# Altium PCB ControlPCB.PcbDoc
Units mm, origin at the board's own origin, x right, y up, seen from the top; angles counter-clockwise.
Board outline 50 x 108 mm, 4 copper layers (Top Layer, Layer 2, Layer 3, Bottom Layer), stack 1.369 mm thick; 96 components, 87 nets, 385 pads, 67 vias.
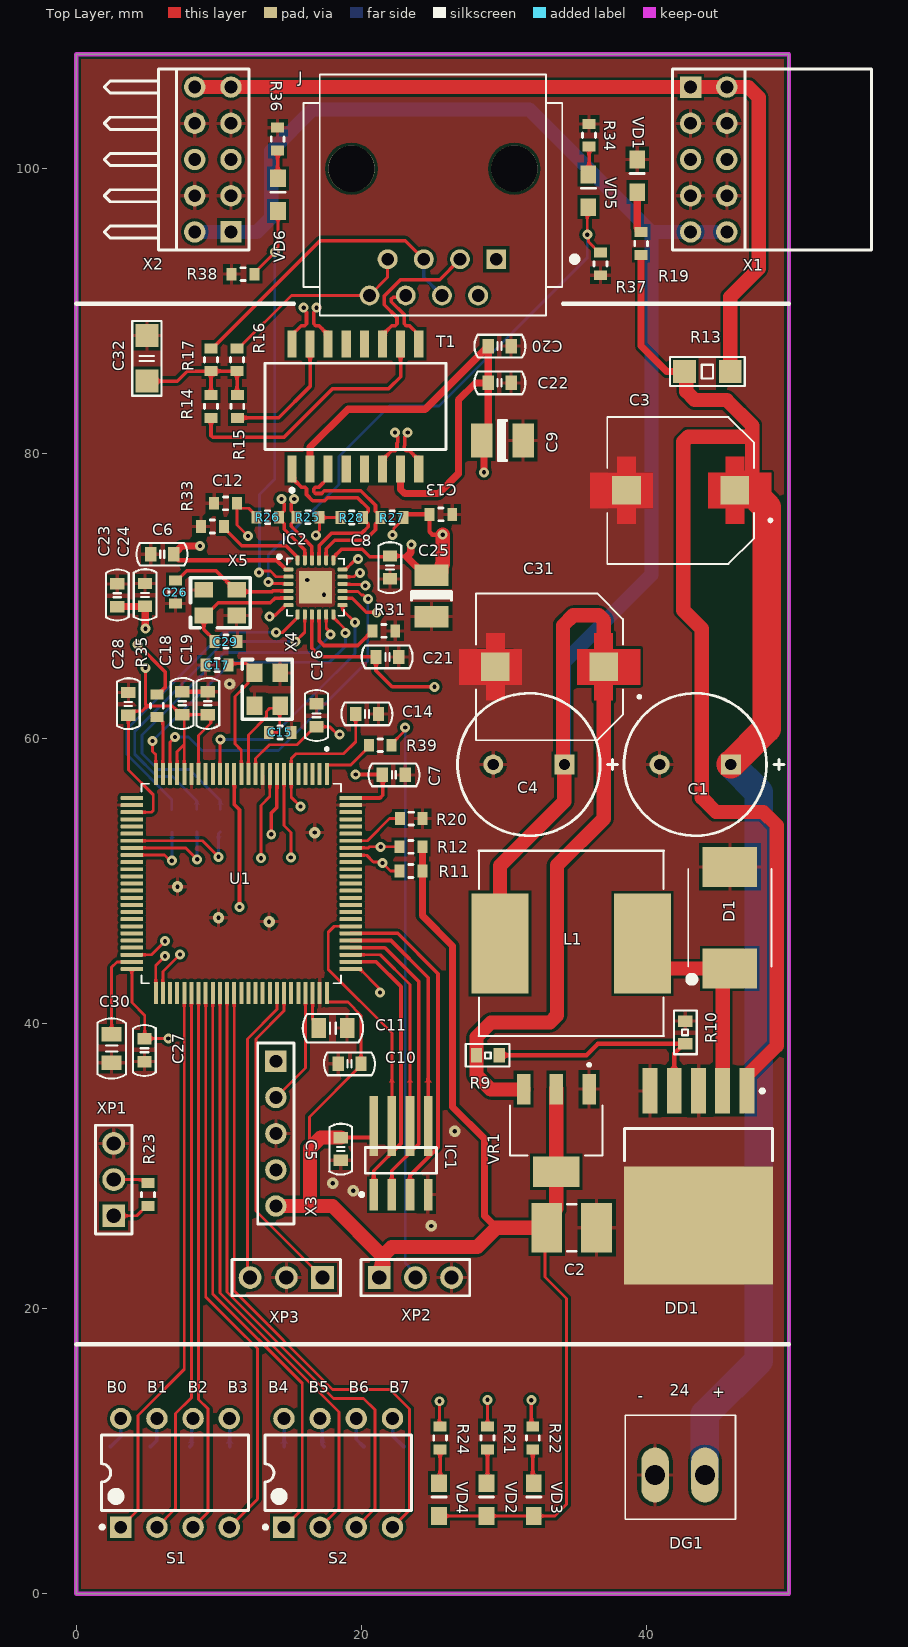
[diagram p0: Top Layer view]
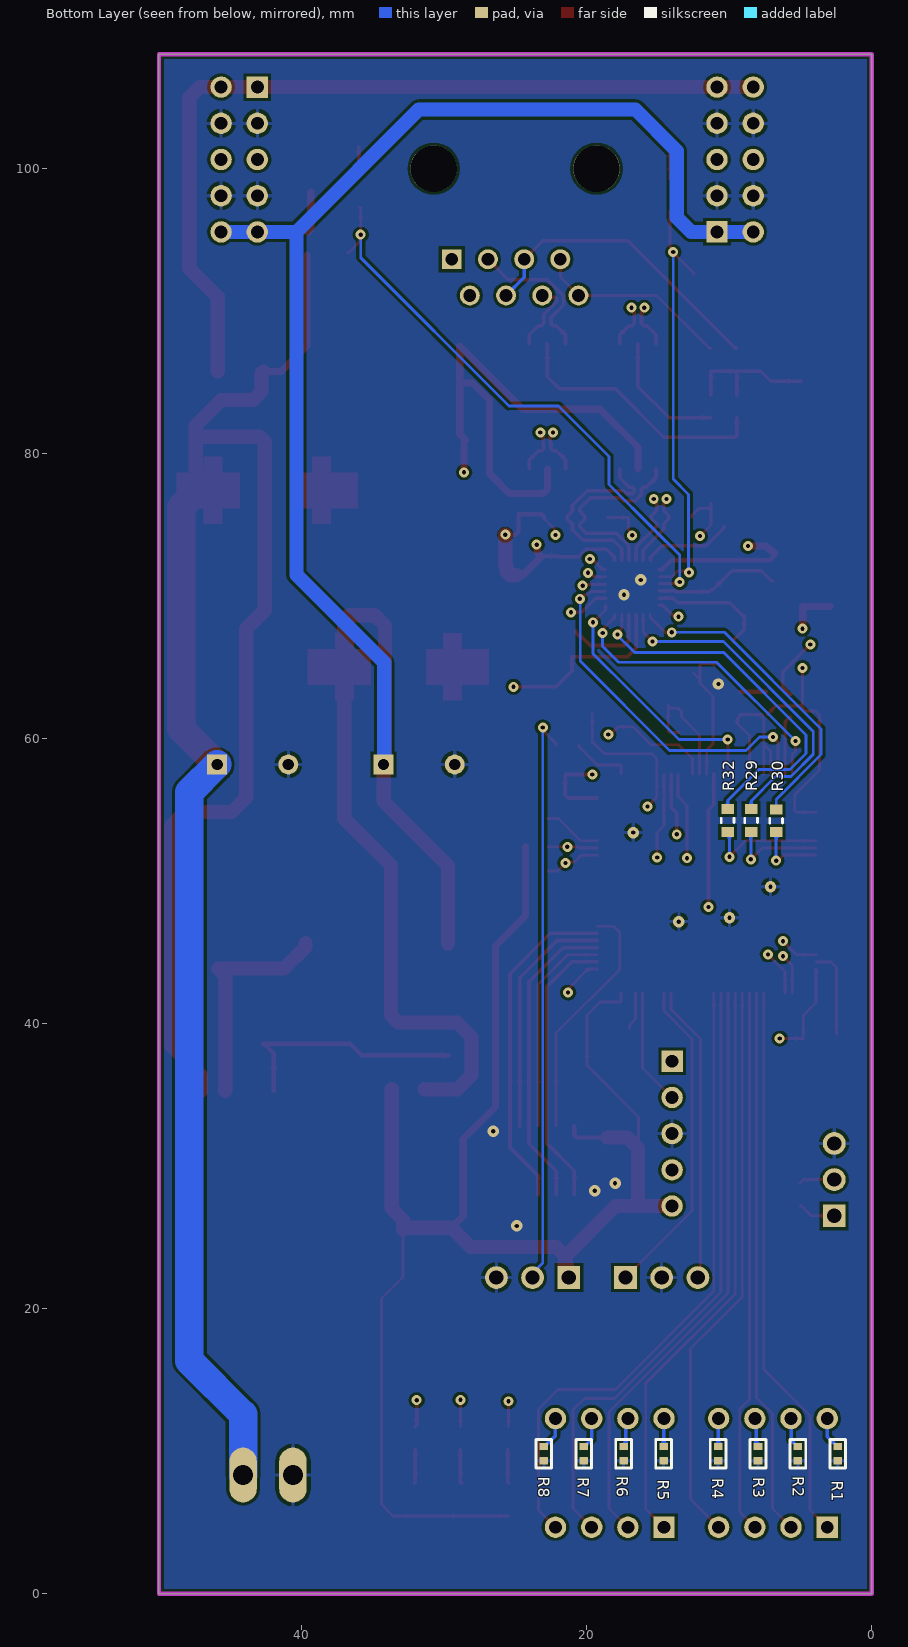
[diagram p1: Bottom Layer view, seen from below]
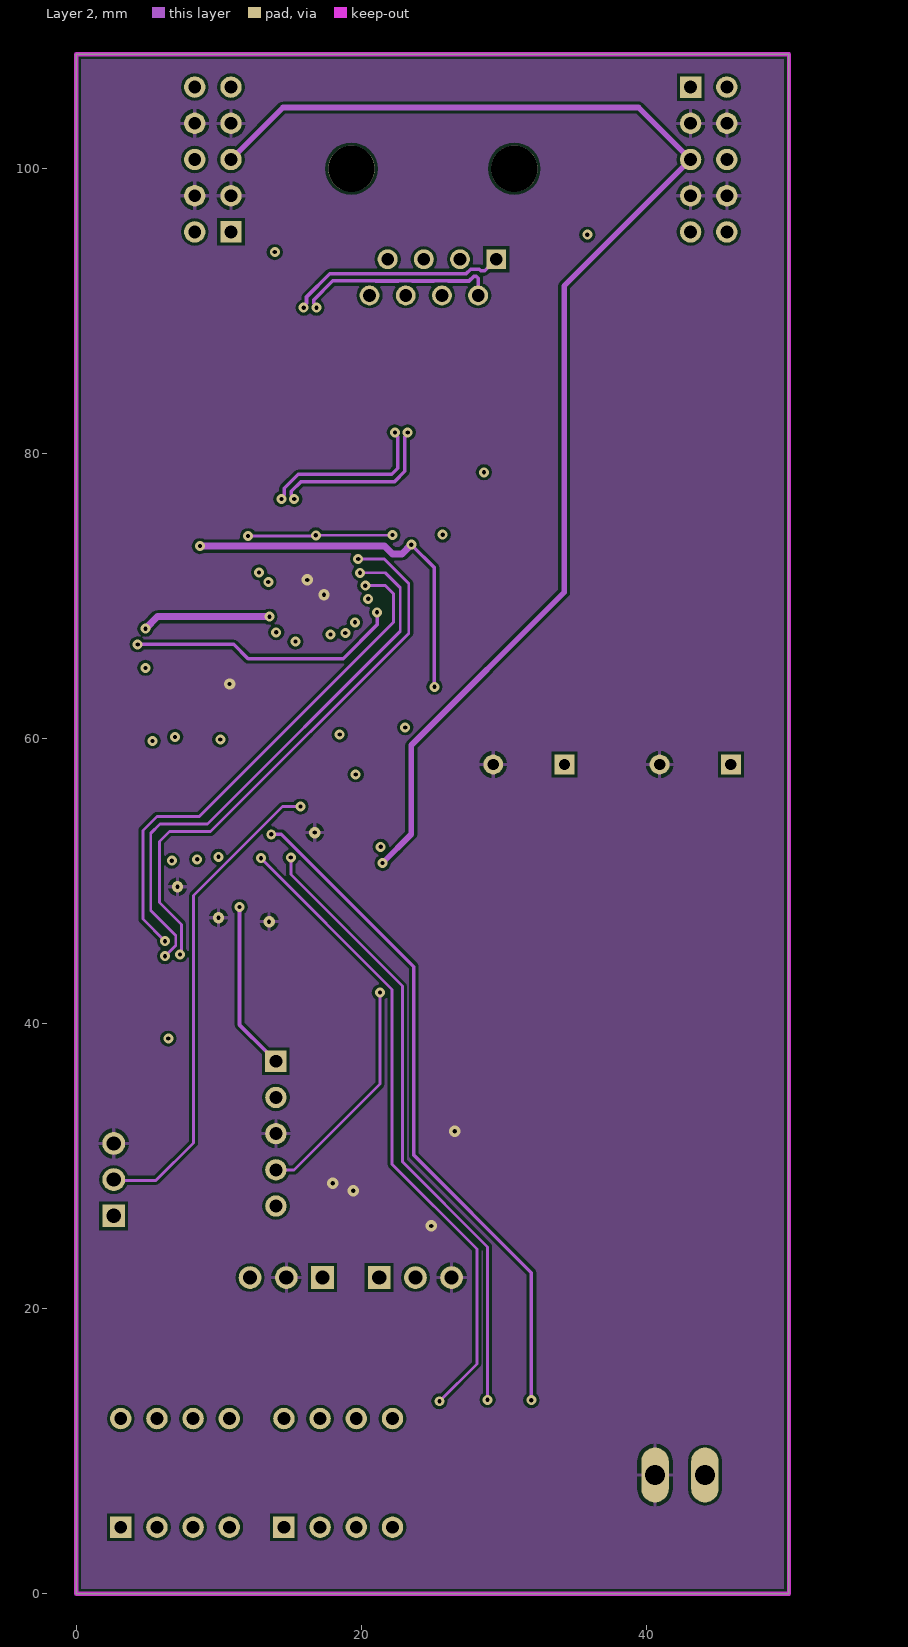
[diagram p2: Layer 2]
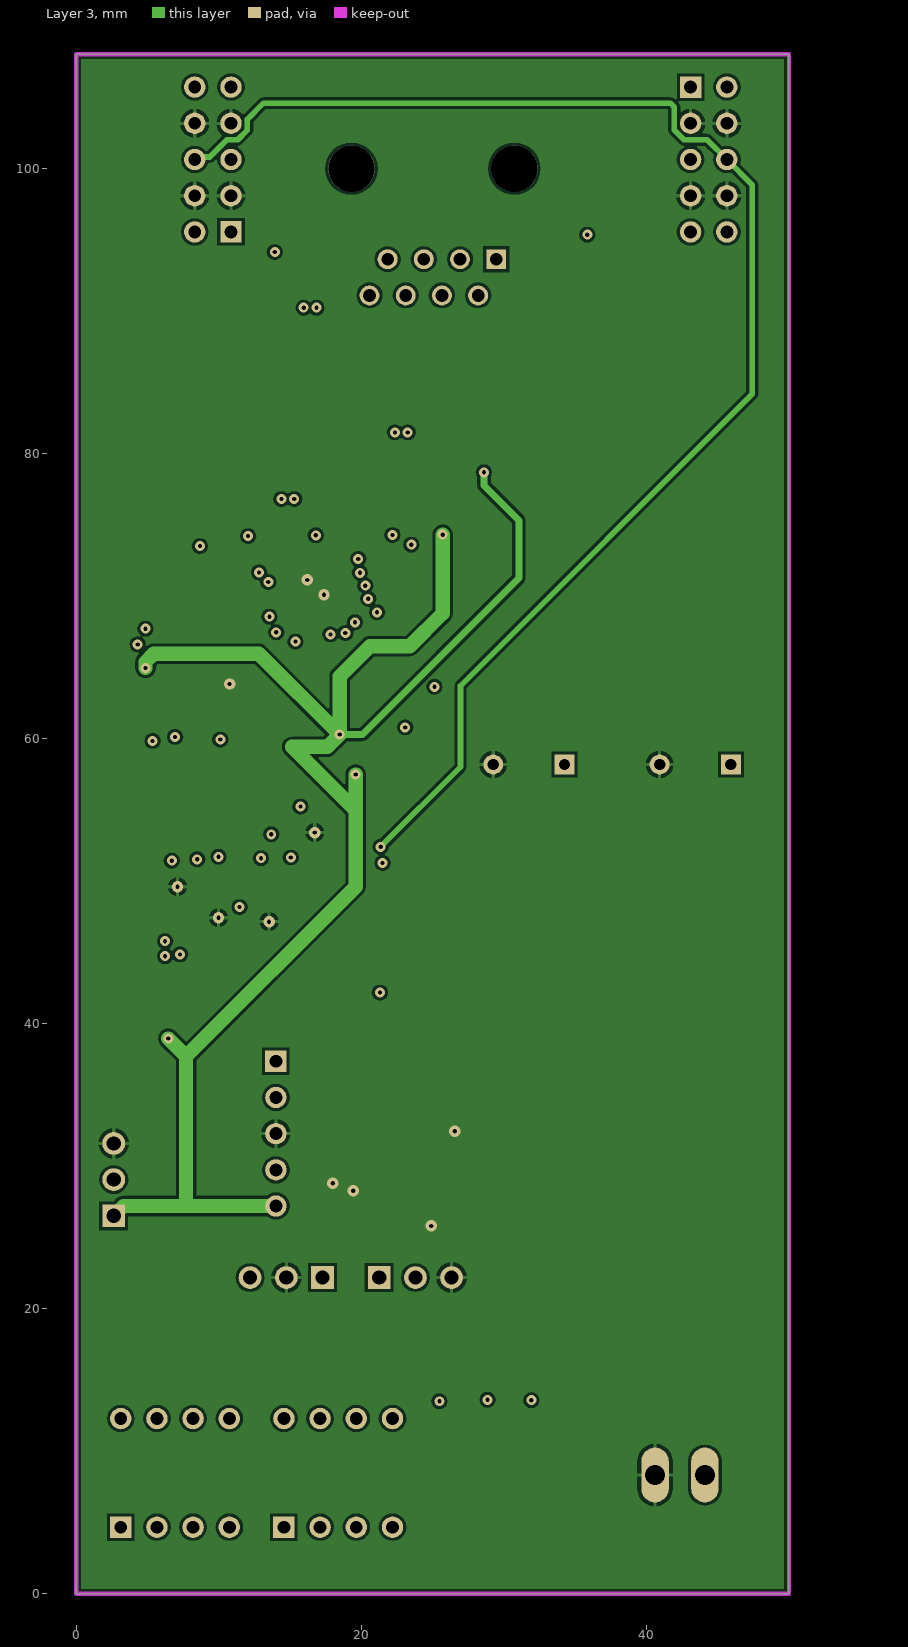
[diagram p3: Layer 3]

## Layer stack, top to bottom
Top Solder: solder mask 0.0254, SM-001, Dk 4
Top Layer: signal copper 0.035
Dielectric 1: prepreg 0.1295, PP-017, Dk 4.3
Dielectric 2: prepreg 0.1295, PP-017, Dk 4.3
Layer 2: signal copper 0.035
Dielectric 3: core 0.7112, Core-039, Dk 4.8
Layer 3: signal copper 0.035
Dielectric 4: prepreg 0.1295, PP-017, Dk 4.3
Dielectric 5: prepreg 0.1295, PP-017, Dk 4.3
Bottom Layer: signal copper 0.035
Bottom Solder: solder mask 0.0254, SM-001, Dk 4

## Board outline
0,0 50,0 50,108 0,108

## Design rules (kind name [scope] priority, off if disabled: settings)
Clearance Clearance_1 [InNetClass('ISO') vs InNet('GND')] p1: gap=1 ignorepadtopadclearanceinfootprint=FALSE
Clearance [All] p2: gap=0.2 ignorepadtopadclearanceinfootprint=FALSE
Clearance Clearance_2 [All] p3: gap=0.2 ignorepadtopadclearanceinfootprint=TRUE except(0: Arc-SMDPad Arc-THPad Arc-Via Track-SMDPad Track-THPad Track-Via SMDPad-SMDPad SMDPad-THPad SMDPad-Via Via-Hole)
ComponentClearance [InComponentClass('J*') vs InComponentClass('J*')] p1: gap=0.01 collisioncheckmode=3 verticalgap=0.01 showdistances=FALSE
DiffPairsRouting [All] p1: maxlimit=0.254 minlimit=0.2 mostfreqgap=0.254 toplayer_minwidth=0.25 toplayer_maxwidth=0.381 toplayer_prefwidth=0.381 midlayer1_minwidth=0.25 midlayer1_maxwidth=0.381 midlayer1_prefwidth=0.381 midlayer2_minwidth=0.25 midlayer2_maxwidth=0.381 midlayer2_prefwidth=0.381 bottomlayer_minwidth=0.25 bottomlayer_maxwidth=0.381 bottomlayer_prefwidth=0.381 maxuncoupledlength=12.7
HoleSize [All] p1: absolutevalues=TRUE maxlimit=5 minlimit=0.025 maxpercent=80.000 minpercent=20.000
MinimumSolderMaskSliver [All] p1: minsoldermaskwidth=0
PolygonConnect [All] p1: connectstyle=Relief reliefconductorwidth=0.254 reliefentries=4 polygonreliefangle="90 Angle" airgapwidth=0.254
RoutingVias [All] p1: holewidth=0.3 width=1 viastyle="Through Hole" minholewidth=0.3 minwidth=0 maxholewidth=1 maxwidth=4
SilkToSolderMaskClearance [IsPad] p1: minsilkscreentomaskgap=0.1 clearancetoexposedcopper=TRUE
SolderMaskExpansion [All] p1: expansion=0.102 istentingtop=FALSE
UnRoutedNet [All] p1: checkbadconnections=TRUE
Width [All] p1: maxlimit=4 minlimit=0.15 preferedwidth=0.254
24 further rules are at their usual default settings.

## Classes and differential pairs
differential pair TR_TX: +TR_TX_P -TR_TX_N
differential pair TR_RX: +TR_RX_P -TR_RX_N
differential pair P1_TX: +P1_TX_P -P1_TX_N
differential pair P1_RX: +P1_RX_P -P1_RX_N

## Components (designator, comment, footprint, x,y, rotation, side; value= is the part's Value field where it differs from the comment)
C1 "220uF 50v" "ECR 10x13mm" 43.425,58.175 r180 top value=220uF
C2 "Cap C" CAPCHIP1812 34.75,25.675 r180 top value="4.7 uF"
C3 "EEEFK1V471SV" CAP_EEEFK1V471SV 42.4,77.4 r180 top
C4 "220uF 50v" "ECR 10x13mm" 31.75,58.175 r180 top value=220uF
C5 "0603 0.1uF" "CAPACITOR 0603" 18.55,32 r270 top
C6 "0603 0.1uF" "CAPACITOR 0603" 6.825,72.925 r180 top
C7 "0603 0.1uF" "CAPACITOR 0603" 21.475,57.45 r0 top
C8 "0603 0.1uF" "CAPACITOR 0603" 22,72.8 r270 top
C9 "Cap T" "TECAP B" 29.9,80.9 r0 top value="10u 16V"
C10 "0603 0.1uF" "CAPACITOR 0603" 19.975,37.175 r180 top
C11 "0805 2.2uF" "CAPACITOR 0805" 17,39.675 r0 top
C12 "0603 0.1uF" CAPCHIP0603 10.475,76.5 r180 top
C13 "0603 0.1uF" CAPCHIP0603 25.575,75.725 r0 top
C14 "0603 0.1uF" "CAPACITOR 0603" 21.2,61.725 r180 top
C15 "0603 18 пФ" CAPCHIP0603 14.3,60.425 r180 top
C16 "0603 0.1uF" "CAPACITOR 0603" 16.85,62.425 r270 top
C17 "0603 18 пФ" CAPCHIP0603 9.875,65.15 r0 top
C18 "0603 0.1uF" "CAPACITOR 0603" 7.425,63.275 r270 top
C19 "0603 0.001uF" "CAPACITOR 0603" 9.225,63.275 r270 top
C20 "0603 0.1uF" "CAPACITOR 0603" 28.9,87.525 r0 top
C21 "0603 0.1uF" "CAPACITOR 0603" 22.625,65.725 r180 top
C22 "0603 0.1uF" "CAPACITOR 0603" 28.9,84.95 r0 top
C23 "0603 0.1uF" "CAPACITOR 0603" 2.875,69.25 r90 top
C24 "0603 1uF" "CAPACITOR 0603" 4.825,69.275 r90 top
C25 "TECAP B 10u 16V" "TECAP B" 24.925,70 r270 top
C26 "0603 18 пФ" CAPCHIP0603 6.95,70.275 r90 top
C27 "0603 0.1uF" "CAPACITOR 0603" 4.775,38.925 r270 top
C28 "0603 0.1uF" "CAPACITOR 0603" 3.65,61.625 r90 top
C29 "0603 18 пФ" CAPCHIP0603 10.5,66.8 r180 top
C30 "0805 2.2uF" "CAPACITOR 0805" 2.475,37.25 r90 top
C31 "EEEFK1V471SV" CAP_EEEFK1V471SV 33.2,65.025 r180 top
C32 "1206 1000p 2kv" "CAPACITOR 1206" 4.95,85.075 r90 top
D1 "MBRS540T3G" DIOM7958X213N 45.85,47.425 r90 top value="0603 0.1uF"
DD1 "LM2596S-ADJ" TO-263 43.65,29.275 r270 top
DG1 "15EDGVC-3.5-2P" 15EDGVC-3.5-16P 44.1,8.325 r270 top
IC1 "GD25Q16CTIGR" NSO8 22.775,30.4 r90 top value=GD25Q16CT
IC2 "LAN8742A-CZ-TR" LAN8742A 15.53,69.35 r0 top
J "5520259-4" TE_5520259-4 25.015,99.975 r180 top
L1 "SRR1208-6R5ML" SRR1208 34.725,45.625 r180 top
R1 "10K" "Resistor 0402" 2.375,9.325 r90 bottom
R2 "10K" "Resistor 0402" 5.175,9.325 r90 bottom
R3 "10K" "Resistor 0402" 7.975,9.325 r90 bottom
R4 "10K" "Resistor 0402" 10.775,9.325 r90 bottom
R5 "10K" "Resistor 0402" 14.6,9.325 r90 bottom
R6 "10K" "Resistor 0402" 17.4,9.325 r90 bottom
R7 "10K" "Resistor 0402" 20.2,9.325 r90 bottom
R8 "10K" "Resistor 0402" 23,9.325 r90 bottom
R9 "0603 3k" "Resistor 0603" 29.675,37.775 r180 top
R10 "0603 1k" "Resistor 0603" 42.725,38.575 r90 top
R11 "4.7k" RESCHIP0603 23.475,50.7 r0 top
R12 "4.7k" RESCHIP0603 23.475,52.4 r0 top
R13 "NC" "Resistor 1206" 45.875,85.75 r180 top
R14 "0603 75R" RESCHIP0603 9.45,83.3 r270 top
R15 "0603 75R" RESCHIP0603 11.3,83.3 r270 top
R16 "0603 75R" RESCHIP0603 11.275,86.575 r90 top
R17 "0603 75R" RESCHIP0603 9.45,86.575 r90 top
R19 "10K" RESCHIP0603 39.625,94.725 r270 top
R20 "510R" RESCHIP0603 23.5,54.375 r180 top
R21 "3K" RESCHIP0603 28.85,10.925 r270 top
R22 "3K" RESCHIP0603 32.025,10.925 r270 top
R23 "0" RESCHIP0603 5.025,28 r90 top
R24 "3K" RESCHIP0603 25.525,10.925 r270 top
R25 "0603 50R" RESCHIP0603 16.25,75.525 r0 top
R26 "0603 50R" RESCHIP0603 13.425,75.525 r180 top
R27 "0603 50R" RESCHIP0603 22.15,75.5 r0 top
R28 "0603 50R" RESCHIP0603 19.325,75.5 r180 top
R29 "0603 33R" RESCHIP0603 8.45,54.25 r90 bottom
R30 "0603 33R" RESCHIP0603 6.696,54.225 r90 bottom
R31 "0603 10k" RESCHIP0603 21.575,67.55 r180 top
R32 "0603 33R" RESCHIP0603 10.1,54.25 r90 bottom
R33 "0603 12.1k" RESCHIP0603 9.55,74.875 r180 top
R34 "0603 220 Ом" RESCHIP0603 35.975,102.325 r270 top
R35 "0603 33R" RESCHIP0603 5.65,62.3 r90 top
R36 "0603 220 Ом" RESCHIP0603 14.125,102.05 r270 top
R37 "0603 1,5k" RESCHIP0603 36.775,93.3 r90 top
R38 "0603 1,5k" RESCHIP0603 11.7,92.575 r0 top
R39 "510R" RESCHIP0603 21.325,59.525 r180 top
S1 "SW-DIP4" DIP-8 6.925,8.475 r90 top
S2 "SW-DIP4" DIP-8 18.375,8.475 r90 top
T1 "B78476A8065A003" EPCS-B78476A8065A003-16 19.575,83.3 r90 top
U1 "STM32F407V" QFP50P1600X1600X160-100N 11.575,49.825 r270 top
VD1 "" 0805- 39.35,98.325 r90 top value=0805
VD2 "" 0805- 28.775,5.45 r90 top value=0805
VD3 "" 0805- 32.1,5.45 r90 top value=0805
VD4 "" 0805- 25.45,5.45 r90 top value=0805
VD5 "" 0805- 35.925,97.275 r90 top value=0805
VD6 "" 0805- 14.15,97 r90 top value=0805
VR1 "LM1117MPX-3.3" VREG_LM1117MPX-3.3 33.675,32.5 r270 top
X1 "PBD-10R" PBD-10RR 43.1,105.7 r270 top
X2 "PLD-10R" PLD-10RR1 10.85,95.54 r90 top
X3 "PLS-5" PLS-5-3D 14,37.355 r270 top
X4 "12Mhz" XTAL_3.2_2.5 12.5,64.6 r270 top value="3.3_2.5 12Mhz"
X5 "25Mhz" XTAL_3.2_2.5 8.95,68.625 r0 top value="3.3_2.5 25Mhz"
XP1 "Battery" ZL201-3 2.625,29.05 r90 top
XP2 "reset setings" ZL201-3 23.79,22.175 r0 top
XP3 "UART" ZL201-3 14.733,22.175 r180 top value=uart

## Footprints (in the part's own frame and the unit in brackets; to place one, negate y for a bottom-side part, rotate by r counter-clockwise, add the part's x,y. Pads: shape width x height; smd on the part's side, far side on the other; paste and mask are expansions set on the pad)
15EDGVC-3.5-16P [mil]
  oval 152x76 hole 55.12: 1(0,0) 2(0,-137.8)
  silkscreen extent -165,-220 122,85, body extent -167,-220 117,87, height 362
0805- [mm]
  rect 1.25x1.1 smd mask+0.06: A(0,0) K(2.3,0)
  silkscreen extent 1.33,-0.5 1.33,0.5, body extent 0.12,-0.62 2.14,0.63, height 1.1
CAP_EEEFK1V471SV [mm]
  rect 2x2 smd paste-2 mask+0: 1(-3.8,0) 2(3.8,0)
  Top Layer region: 4.45,1.25 6.35,1.25 6.35,-1.25 4.45,-1.25 4.45,-2.35 3.15,-2.35 3.15,-1.25 1.95,-1.25 1.95,1.25 3.15,1.25 3.15,2.35 4.45,2.35
  Top Layer region: -3.15,1.25 -1.95,1.25 -1.95,-1.25 -3.15,-1.25 -3.15,-2.35 -4.45,-2.35 -4.45,-1.25 -6.35,-1.25 -6.35,1.25 -4.45,1.25 -4.45,2.35 -3.15,2.35
  silkscreen extent -6.4,-5.15 5.15,5.15, body extent -5.85,-5.15 5.85,5.15, height 9.5
"CAPACITOR 0603" [mm]
  rect 0.8x1 smd: 1(0,0) 2(1.6,0)
  silkscreen extent -0.97,-0.8 2.6,0.8, body extent -0.01,-0.38 1.64,0.42, height 0.81
"CAPACITOR 0805" [mm]
  rect 1x1.4 smd: 1(0,0) 2(2,0)
  silkscreen extent -1.12,-1 3.12,1, body extent 0.01,-0.6 2.01,0.6, height 1.26
"CAPACITOR 1206" [mm]
  rect 1.6x1.6 smd: 1(0,0) 2(3.2,0)
  silkscreen extent -1.02,-1.02 4.23,1.02, body extent 0.01,-0.8 3.22,0.8, height 1.26
CAPCHIP0603 [mm] "Chip Capacitor, 2-Leads, Body 1,6x0,8mm"
  rect 0.7x0.9 smd mask+0.06: 1(-0.8,0) 2(0.8,0)
  silkscreen extent -0.15,-0.45 0.15,0.45, body extent -0.8,-0.4 0.8,0.4, height 0.9
CAPCHIP1812 [mm] "Chip Capacitor, 2-Leads, Body 4,50x3,20mm,"
  rect 2.15x3.5 smd mask+0.06: 1(-1.75,0) 2(1.75,0)
  silkscreen extent -0.3,-1.65 0.3,1.65, body extent -2.25,-1.6 2.25,1.6, height 1
DIOM7958X213N [mil]
  rect 110x150 smd: A(140.49,0) C(-140.49,0)
  silkscreen extent -176,-115 135,115
DIP-8 [mm] "DIP; 8 Leads; Row Spacing 7.62 mm; Pitch 2.54 mm"
  rect 1.5x1.5 hole 0.9: 1(-3.81,3.81)
  round 1.5 hole 0.9: 2(-3.81,1.27) 3(-3.81,-1.27) 4(-3.81,-3.81) 5(3.81,-3.81) 6(3.81,-1.27) 7(3.81,1.27) 8(3.81,3.81)
  silkscreen extent -3.93,-5.15 2.65,5.23, body extent -3.6,-5.15 3.6,5.15, height 5.08
"ECR 10x13mm" [mm] "Rad Capacitor 50В-220мкФ"
  rect 1.4x1.4 hole 0.8 mask+0.06: 1(-2.5,0)
  round 1.4 hole 0.8 mask+0.06: 2(2.5,0)
  silkscreen extent -6.22,-5 5,5
EPCS-B78476A8065A003-16 [mm] "SMD, 16-Leads, Body 12.7x7.11mm, Pitch 1.27mm"
  rect 1.905x0.64 smd: 1(-4.383,4.445) 2(-4.383,3.175) 3(-4.383,1.905) 4(-4.383,0.635) 5(-4.383,-0.635) 6(-4.383,-1.905) 7(-4.383,-3.175) 8(-4.383,-4.445) 9(4.383,-4.445) 10(4.383,-3.175) 11(4.383,-1.905) 12(4.383,-0.635) 13(4.383,0.635) 14(4.383,1.905) 15(4.383,3.175) 16(4.383,4.445)
  silkscreen extent -6.01,-6.35 3.03,6.35, body extent -3.55,-6.35 3.55,6.35, height 5.85
LAN8742A [mm]
  rrect50% 0.69x0.28 smd: 1(-0.645,2.5) 2(-0.645,2) 3(-0.645,1.5) 4(-0.645,1) 5(-0.645,0.5) 6(-0.645,0) 13(3.145,0) 14(3.145,0.5) 15(3.145,1) 16(3.145,1.5) 17(3.145,2) 18(3.145,2.5)
  rrect50% 0.28x0.69 smd: 7(0,-0.645) 8(0.5,-0.645) 9(1,-0.645) 10(1.5,-0.645) 11(2,-0.645) 12(2.5,-0.645) 19(2.5,3.145) 20(2,3.145) 21(1.5,3.145) 22(1,3.145) 23(0.5,3.145) 24(0,3.145)
  rect 2.286x2.286 smd: 25(1.25,1.25)
  silkscreen extent -0.75,-0.74 3.26,3.27, body extent -0.75,-0.74 3.26,3.27, height 1
NSO8 [mm] "SOIC, 8-Leads, Body 4.9x3.9mm, Pitch 1.27mm"
  rect 2.2x0.6 smd mask+0.06: 1(-2.4,1.905) 2(-2.4,0.635) 3(-2.4,-0.635) 4(-2.4,-1.905)
  rect 4.2x0.6 smd mask+0.06: 5(2.4,-1.905) 6(2.4,-0.635) 7(2.4,0.635) 8(2.4,1.905)
  silkscreen extent -2.52,-2.5 0.9,2.88, body extent -3,-2.45 3,2.45, height 1.7
PBD-10RR [mm] "Connector; Header; 5x2 Position"
  rect 1.5x1.5 hole 0.9: 1(0,0)
  round 1.5 hole 0.9: 2(0,2.54) 3(2.54,0) 4(2.54,2.54) 5(5.08,0) 6(5.08,2.54) 7(7.62,0) 8(7.62,2.54) 9(10.16,0) 10(10.16,2.54)
  silkscreen extent -1.27,-1.27 11.43,12.7, body extent -1.27,-0.3 11.43,12.7, height 5
PLD-10RR1 [mm] "Connector; Header; 5x2 Position"
  rect 1.5x1.5 hole 0.9: 1(0,0)
  round 1.5 hole 0.9: 2(0,2.54) 3(2.54,0) 4(2.54,2.54) 5(5.08,0) 6(5.08,2.54) 7(7.62,0) 8(7.62,2.54) 9(10.16,0) 10(10.16,2.54)
  silkscreen extent -1.27,-1.27 11.43,8.89, body extent -1.27,-1.27 11.43,9.89, height 7.99
PLS-5-3D [mm] "Connector; Header; 5 Position"
  rect 1.5x1.5 hole 0.9: 1(0,0)
  round 1.5 hole 0.9: 2(2.54,0) 3(5.08,0) 4(7.62,0) 5(10.16,0)
  silkscreen extent -1.27,-1.27 11.43,1.27, body extent -1.27,-1.27 11.43,1.27, height 8.44
QFP50P1600X1600X160-100N [mm]
  rrect25% 1.56x0.28 smd: 1(-7.68,6) 2(-7.68,5.5) 3(-7.68,5) 4(-7.68,4.5) 5(-7.68,4) 6(-7.68,3.5) 7(-7.68,3) 8(-7.68,2.5) 9(-7.68,2) 10(-7.68,1.5) 11(-7.68,1) 12(-7.68,0.5) 13(-7.68,0) 14(-7.68,-0.5) 15(-7.68,-1) 16(-7.68,-1.5) 17(-7.68,-2) 18(-7.68,-2.5) 19(-7.68,-3) 20(-7.68,-3.5) 21(-7.68,-4) 22(-7.68,-4.5) 23(-7.68,-5) 24(-7.68,-5.5) 25(-7.68,-6) 51(7.68,-6) 52(7.68,-5.5) 53(7.68,-5) 54(7.68,-4.5) 55(7.68,-4) 56(7.68,-3.5) 57(7.68,-3) 58(7.68,-2.5) 59(7.68,-2) 60(7.68,-1.5) 61(7.68,-1) 62(7.68,-0.5) 63(7.68,0) 64(7.68,0.5) 65(7.68,1) 66(7.68,1.5) 67(7.68,2) 68(7.68,2.5) 69(7.68,3) 70(7.68,3.5) 71(7.68,4) 72(7.68,4.5) 73(7.68,5) 74(7.68,5.5) 75(7.68,6)
  rrect25% 0.28x1.56 smd: 26(-6,-7.68) 27(-5.5,-7.68) 28(-5,-7.68) 29(-4.5,-7.68) 30(-4,-7.68) 31(-3.5,-7.68) 32(-3,-7.68) 33(-2.5,-7.68) 34(-2,-7.68) 35(-1.5,-7.68) 36(-1,-7.68) 37(-0.5,-7.68) 38(0,-7.68) 39(0.5,-7.68) 40(1,-7.68) 41(1.5,-7.68) 42(2,-7.68) 43(2.5,-7.68) 44(3,-7.68) 45(3.5,-7.68) 46(4,-7.68) 47(4.5,-7.68) 48(5,-7.68) 49(5.5,-7.68) 50(6,-7.68) 76(6,7.68) 77(5.5,7.68) 78(5,7.68) 79(4.5,7.68) 80(4,7.68) 81(3.5,7.68) 82(3,7.68) 83(2.5,7.68) 84(2,7.68) 85(1.5,7.68) 86(1,7.68) 87(0.5,7.68) 88(0,7.68) 89(-0.5,7.68) 90(-1,7.68) 91(-1.5,7.68) 92(-2,7.68) 93(-2.5,7.68) 94(-3,7.68) 95(-3.5,7.68) 96(-4,7.68) 97(-4.5,7.68) 98(-5,7.68) 99(-5.5,7.68) 100(-6,7.68)
  silkscreen extent -9.54,-7 7,7
RESCHIP0603 [mm] "Chip Resistor, 2-Leads, Body 1,6x0,8mm"
  rect 0.7x0.9 smd mask+0.06: 1(-0.8,0) 2(0.8,0)
  silkscreen extent -0.15,-0.45 0.15,0.45, body extent -0.8,-0.4 0.8,0.4, height 0.4
"Resistor 0402" [mm]
  rect 0.5x0.6 smd: 1(0,0) 2(1,0)
  silkscreen extent -0.5,-0.55 1.5,0.55, body extent 0,-0.28 1,0.27, height 0.46
"Resistor 0603" [mm]
  rect 0.8x1 smd: 1(0,0) 2(1.6,0)
  silkscreen extent -0.72,-0.8 2.35,0.8, body extent -0.03,-0.45 1.63,0.45, height 0.46
"Resistor 1206" [mm]
  rect 1.6x1.6 smd: 1(0,0) 2(3.2,0)
  silkscreen extent -1.02,-1.02 4.23,1.02, body extent -0.03,-0.79 3.4,0.8, height 0.5
SRR1208 [mm]
  rect 4x7 smd: P$1(-5,0) P$2(5,0)
  silkscreen extent -6.5,-6.5 6.5,6.5
TE_5520259-4 [mm]
  rect 1.398x1.398 hole 0.89: 1(-4.445,6.35)
  round 1.398 hole 0.89: 2(-3.175,8.89) 3(-1.905,6.35) 4(-0.635,8.89) 5(0.635,6.35) 6(1.905,8.89) 7(3.175,6.35) 8(4.445,8.89)
  round 3.25 hole 3.25 unplated: ""(-5.715,0) ""(5.715,0)
  silkscreen extent -10.14,-6.61 9.08,10.3
"TECAP B" [mm] "Chip Capacitor, 2-Leads, Body 3,5x2,8mm"
  rect 1.5x2.4 smd mask+0.06: 1(-1.45,0) 2(1.45,0)
  silkscreen extent -0.3,-1.4 0.3,1.4, body extent -1.75,-1.4 1.75,1.4, height 1.92
TO-263 [mm] "D2-PAK, 6-Leads, Body 8.6x10.2mm, Pitch 1.7mm, Lead Span 14.1mm"
  rect 3.2x1.05 smd mask+0.06: 1(-6,3.4) 2(-6,1.7) 3(-6,0) 4(-6,-1.7) 5(-6,-3.4)
  rect 8.3x10.45 smd mask+0.06: 6(3.45,0)
  silkscreen extent -6.12,-5.2 -1.1,5.2, body extent -7.18,-5.08 7.46,5.08, height 4.57
VREG_LM1117MPX-3.3 [mm]
  rect 2.15x0.95 smd: 1(-2.9,2.3) 2(-2.9,0) 3(-2.9,-2.3)
  rect 2.15x3.25 smd: 4(2.9,0)
  silkscreen extent -4.7,-3.25 1.75,3.25, body extent -3.5,-3.25 3.5,3.25, height 1.8
XTAL_3.2_2.5 [mm]
  rect 1.3x1.1 smd: 1(0,0) 2(2.3,0) 3(2.3,1.8) 4(0,1.8)
  silkscreen extent -0.94,-0.86 3.25,2.64, body extent -0.46,-0.34 2.74,2.16, height 0.82
ZL201-3 [mm] "Connector; PLS-3; pitch 2.54"
  rect 1.6x1.6 hole 1 mask+0.06: 1(-2.54,0)
  round 1.6 hole 1 mask+0.06: 2(0,0) 3(2.54,0)
  silkscreen extent -3.81,-1.27 3.81,1.27, body extent -3.81,-1.27 3.81,1.27, height 8.44

## Part data
C1 C4: library part "Cap Pol", "Polarized Capacitor (Rad)", Package=10x13, Voltage=50, Type=Type, URL=http://www.hitano.com.tw/PDF/ECR_081225.pdf
C2: "Ceramic Capacitor", Nominal_voltage_V={Nominal_voltage_V}, Package=1812, Tolerance_Percent={Tolerance_Percent}, Body={Body}, Class="Электронные компоненты", Installation={Installation}, Ordering_Information={Ordering_Information}, Pins={Pins}, SubClass=Конденсаторы, TKE={TKE}
C3 C31: "470ÂµF 35V Aluminum Electrolytic Capacitors Radial, Can - SMD 80mOhm @ 100kHz 2000 Hrs @ 105Â°C", Package="RADIAL-2 Panasonic", Availability="In Stock", Check_prices=https://www.snapeda.com/parts/EEE-FK1V471SV/Panasonic/view-part/?ref=eda, MF="Panasonic Electronic Components", MP=EEE-FK1V471SV, Price=None, Purchase-URL=https://pricing.snapeda.com/search/part/EEE-FK1V471SV/?ref=eda, SnapEDA_Link=https://www.snapeda.com/parts/EEE-FK1V471SV/Panasonic/view-part/?ref=snap
C5 C6 C7 C8 C10 C14 C16 C18 C19 C20 C21 C22 C23 C24 C27 C28: library part Capasitor, Package=0603
C9: "Solid Tantalum Surface Mount Capacitors", Package="TECAP B", Voltage=16v, Type=Type
C11 C30: library part Capasitor, Package=0805
C12 C13 C15 C17 C26 C29: library part "Cap C", "Керамическтй конденсатор SMD C0603", Package=0603, Type=0603
C25: library part "Cap T", "Solid Tantalum Surface Mount Capacitors", Package="TECAP B", Voltage=16V, Type="TECAP B"
C32: library part Capasitor, Package=1206
D1: "Diode Schottky 40V 5A Surface Mount SMC", Package="DO-214 ON Semiconductor", Availability=Unavailable, MF="ON Semiconductor", MP=MBRS540T3G, Price=None, SnapEDA_Link=https://www.snapeda.com/parts/MBRS540T3G/ON%20Semiconductor/view-part/78777/?ref=snap
DD1: "SIMPLE SWITCHER® Power Converter 150 KHz 3A Step-Down Voltage Regulator, 5-pin TO-263", Manufacturer="National Semiconductor", ComponentLink1URL=http://www.national.com/ds/LM/LM2596.pdf, ComponentLink2URL=http://www.national.com/pf/LM/LM2596.html, ComponentLink3URL=http://www.national.com/packaging/folders/ts5b.html, CompType=Switcher, PartNumber=LM2596S-ADJ, Published=13.04.2012, Publisher="Reukov A.V."
IC1: library part W25Q128FVEIG, "128M-bit Serial Flash Memory with uniform 4KB sectors and Dual/Quad SPI and QPI"
J: "Jack Modular Connector 8p8c _RJ45, Ethernet_ Vertical Unshielded Cat3", Package=None, Availability=Unavailable, Centerline_Pitch="1.02 mm[.04 in]", EU_RoHS_Compliance=Compliant, MF="TE Connectivity", MP=5520259-4, Number_of_Positions=8, Price=None, SnapEDA_Link=https://www.snapeda.com/parts/5520259-4/TE%20Connectivity%20AMP%20Connectors/view-part/2000900/?ref=snap, TE_purchase_URL=https://www.te.com/usa-en/product-5520259-4.html?te_bu=Cor&te_type=disp&te_campaign=seda_glo_cor-seda-global-disp-prtnr-fy19-seda-model-bom-cta_sma-317_1&elqCampaignId=32493
L1: "6.5ÂµH Shielded Wirewound Inductor 6A 18mOhm Max Nonstandard", Package="Nonstandard Bourns", Availability=Unavailable, MF=Bourns, MP=SRR1208-6R5ML, Price=None, SnapEDA_Link=https://www.snapeda.com/parts/SRR1208-6R5ML/Bourns/view-part/353452/?ref=snap
R1 R2 R3 R4 R5 R6 R7 R8: library part Resistor, Package=0402
R9 R10: library part Resistor, Package=0603
R11 R12 R19 R20 R21 R22 R23 R24 R39: library part Res, "Resistor", Package=0603, Tolerance_Percent={Tolerance_Percent}, CompType=Resistor, Pins=2
R13: library part Resistor, Package=1206
R14 R15 R16 R17 R25 R26 R27 R28 R29 R30 R31 R32 R33 R35 R37 R38: library part Res, "Резистор", Package=0603, Power_W={Power_W}, Tolerance_Percent={Tolerance_Percent}, Body={Body}, Class="Электронные компоненты", Installation={Installation}, Ordering_Information={Ordering_Information}, Pins=2, SubClass=Резисторы
R34 R36: library part Res, "Резистор SMD R0603", Package=0603, Tolerance=%, PWR=Value, Type=0603
S1 S2: "DIP Switch", Package=SW-DIP8, LatestRevisionDate=17-Jul-2002, LatestRevisionNote="Re-released for DXP Platform.", PackageReference=DIP-8, Published=24-Mar-1999, Publisher="Altium Limited"
T1: "Magnetics Modules for LAN Application, 10/100 Base-T Magnetics Module, 1 Port, 0 to 70 degC, 16-Pin SMD, RoHS, Tape and Reel", Inductance L="350 uH min.", Manufacturer=EPCOS, Operating Temperature Range="0 to 70 degC", Voltage Test="1500 V AC", ComponentLink1Description="Manufacturer URL", ComponentLink1URL=http://www.epcos.com/, ComponentLink2Description=Datasheet, ComponentLink2URL=http://www.epcos.com/inf/30/ds/lan_mod/B78476A8065A003.pdf, ComponentLink3Description="Package Specification", ComponentLink3URL=http://www.epcos.com/inf/30/ds/lan_mod/B78476A8065A003.pdf, DatasheetVersion=08/2012, Insertion loss="-1.0 dB max.", Mounting Technology="Surface Mount", PackageDescription="16-Pin Surface Mount Device, Body 12.7 x 7.11 mm, Pitch 1.27 mm", PackageReference=B78476A8065A003-16, PackageVersion=08/2012, Packing="Tape and Reel", PartNumber=B78476A8065A003, Ports=1, RoHS=TRUE, Turns Ratio="1CT +/- 3%", Weight="0.8 g"
U1: library part STM32F303V, "ARMÂ® CortexÂ®-M4 STM32F3 Microcontroller IC 32-Bit 72MHz 100-LQFP (14x14)", Package="LQFP-100 STMicroelectronics", Availability=Unavailable, MF=STMicroelectronics, MP=STM32F303V, Price=None
VD1 VD2 VD3 VD4 VD5 VD6: library part "LED SMD", Package=0805, CompType=LED, Pins=2
  VD2: Note=Read
  VD3: Note=Green
  VD4 VD5 VD6: Note=Blue
VR1: "800-mA 15-V linear voltage regulator", Package="SOT-223-4 Texas Instruments", Availability="In Stock", Check_prices=https://www.snapeda.com/parts/LM1117MPX-3.3/Texas+Instruments/view-part/?ref=eda, MF="Texas Instruments", MP=LM1117MPX-3.3, Price=None, Purchase-URL=https://pricing.snapeda.com/search/part/LM1117MPX-3.3/?ref=eda, SnapEDA_Link=https://www.snapeda.com/parts/LM1117MPX-3.3/Texas+Instruments/view-part/?ref=snap
X1 X2: "Header, 5-Pin, Dual row", Package=NC
X3: "Header, 5-Pin", LatestRevisionDate=17-Jul-2002, LatestRevisionNote="Re-released for DXP Platform.", Publisher="Altium Limited"
X4 X5: library part "XTAL 2-pin"
XP1: library part "Select jump", Package=NC, Class="Электронные компоненты", Installation=DIP, Ordering_Information={Ordering_Information}, Pins=3, Pitch_mm={Pitch_mm}, SubClass=Разъемы, Type_of_connector={Type_of_connector}
XP2 XP3: library part "Select jump", "Ter120", Package=NC, Class="Электронные компоненты", Installation=DIP, Ordering_Information={Ordering_Information}, Pins=3, Pitch_mm={Pitch_mm}, SubClass=Разъемы, Type_of_connector={Type_of_connector}

## Via types
v1: diameter 0.7, hole 0.3, Top Layer to Bottom Layer, tented both sides, 56 vias
v2: diameter 0.8, hole 0.3, Top Layer to Bottom Layer, tented both sides, 11 vias

## Nets (pads, with @x,y where several pads share a name; then routed paths per layer and width w, separated by ;. In a path a pad name is that pad's centre, name@x,y a point inside that pad or via, vN(x,y) a via of type N, cw(c..) or ccw(c..) an arc to the next point about the centre after c; other vN are vias at no path point)
+3.3v: C2.2 C5.1 C6.1 C7.1 C8.1 C9.1 C10.1 C12.1 C13.1 C16.2 C18.2 C19.2 C20.1 C21.2 C22.1 C25.1 C27.1 C28.1 IC1.8 IC2.1 IC2.9 IC2.19 R11.2 R12.2 R23.1 R25.2 R26.2 R27.2 R28.2 T1.2 T1.7 U1.11 U1.19 U1.21 U1.22 U1.28 U1.50 U1.75 U1.100 VD2.A VD3.A VD4.A VR1.2 VR1.4 X3.5 XP1.1 XP2.1 | length 411.1
  Top Layer w0.2: XP1.1 4.235,26.51 4.925,27.2 R23.1 ; U1.50 3.895,41.48 4.8,40.575 C27.1@4.8,38.95 ; U1.28 5.283,54.825 5.4,54.942 5.4,56.05 3.65,57.8 C28.1 3.95,61.925 4.625,61.925 4.975,62.275 ; C27.1 C27.1@4.8,38.95 ; v1(4.85,64.95) 4.85,62.4 4.975,62.275 ; v1(6.45,38.95) C27.1@4.8,38.95 ; U1.22 7.075,59.075 7.575,59.575 ; C18.2@7.325,61.675 6.725,62.275 4.975,62.275 ; U1.21 7.575,59.575 ; U1.19 8.575,60.2 9.425,61.05 9.425,61.375 9.225,61.575 C19.2 7.687,61.675 7.687,61.488 7.575,61.375 7.575,59.575 ; C12.1 C12.1@11.275,76.15 ; v1(12.05,74.2) 11.275,74.975 C12.1@11.275,76.15 ; U1.11 12.575,58.585 13.545,59.555 15.48,59.555 16.75,60.825 C16.2 17.783,60.825 18.333,60.275 v1(18.475,60.275) ; R26.2 12.625,75.625 12.1,76.15 C12.1@11.275,76.15 ; 16.4,31.25 16.35,31.3 16.35,33.45 19.975,37.075 C10.1 19.975,40.575 19.05,41.5 17.615,41.5 17.575,41.54 U1.75 ; v1(16.8,74.25) 16.8,74.385 17.05,74.635 R25.2 17.075,75.5 R28.2 ; v1(22.175,74.275) 22.271,74.371 22.271,74.721 R27.2@22.95,75.4 ; VD4.A VD2.A VD3.A 33.575,5.45 34.4,6.275 34.4,20.7 32.875,22.225 C2.2@32.875,25.55
  Top Layer w0.25: IC2.9 16.53,66.32 17.125,65.725 C21.2 21.025,64.75 22.15,63.625 v1(25.125,63.625) ; IC2.19 18.045,72.51 18.045,72.715 18.605,73.275 20.055,73.275 20.58,72.75 21.95,72.75 C8.1 23.125,72.8 23.175,72.75 ; U1.100 21.3,55.825 21.5,56.025 21.5,57.425 C7.1 21.45,57.475 v1(19.6,57.475)
  Top Layer w0.254: C2.2@32.875,25.675 C2.2
  Top Layer w0.3: C6.1 6.825,72.825 7.15,72.5 14.05,72.5 14.7,71.85 IC2.1 ; C5.1 20.72,32 20.87,32.15 IC1.8 ; R27.2@22.95,75.4 R27.2 22.95,75.525 23.15,75.725 C13.1 24.775,74.5 24.975,74.3 v1(25.7,74.3)
  Top Layer w0.5: C6.1 6.825,73.025 6.975,73.175 7.075,73.175 7.4,73.5 v1(8.675,73.5) ; T1.2 16.4,80.45 19.05,83.1 24.475,83.1 28.65,87.275 28.75,87.275 28.9,87.425 C20.1 ; T1.7 22.75,77.475 23.05,77.175 25.4,77.175 26.8,78.575 26.8,83.75 28,84.95 C22.1 ; v1(23.5,73.6) 23.462,73.562 23.462,73.037 23.175,72.75 24.475,71.45 C25.1 ; R12.2 R11.2 24.275,47.575 26.4,45.45 26.4,34.15 28.65,31.9 28.65,26.5 29.475,25.675 ; v1(28.6,78.675) 28.6,80.75 C9.1 28.9,81.35 C22.1 ; C20.1@28.9,87.275 C22.1
  Top Layer w1: X3.5 16.4,27.195 ; C5.1 17.15,32 16.4,31.25 16.4,27.195 ; XP2.1 21.486,22.411 21.486,23.675 ; C25.1 25.375,71.45 25.625,71.7 25.625,72.15 25.7,72.225 v1(25.7,74.3) ; C2.2@32.875,25.55 C2.2@32.875,25.675 ; VR1.2 VR1.4 33.675,27.025 32.875,26.225 C2.2@32.875,25.675 ; 16.4,27.195 17.966,27.195 21.486,23.675 ; 21.486,23.675 22.136,24.325 28.125,24.325 29.475,25.675 C2.2@32.875,25.675
  Layer 2 w0.2: v1(12.05,74.2) 12.435,74.2 ; 12.5,74.2 16.75,74.2 v1(16.8,74.25) 16.812,74.262 22.162,74.262 v1(22.175,74.275)
  Layer 2 w0.25: v1(23.5,73.6) 25.125,71.975 v1(25.125,63.625)
  Layer 2 w0.5: v1(8.675,73.5) 21.625,73.5 22.175,72.95 22.85,72.95 v1(23.5,73.6)
  Layer 3 w0.5: v1(18.475,60.275) 20.075,60.275 31.05,71.25 31.05,75.3 28.6,77.75 v1(28.6,78.675)
  Layer 3 w1: XP1.1 3.31,27.195 7.7,27.195 ; v1(4.85,64.95) 4.85,65.364 5.436,65.95 12.8,65.95 v1(18.475,60.275) ; v1(6.45,38.95) 7.7,37.7 ; X3.5 7.7,27.195 ; v1(19.6,57.475) 19.6,54.95 ; v1(25.7,74.3) 25.7,68.775 23.4,66.475 20.6,66.475 18.475,64.35 v1(18.475,60.275) ; 7.7,27.195 7.7,37.7 ; 7.7,37.7 19.6,49.6 19.6,54.95 ; v1(18.475,60.275) 17.612,59.412 15.138,59.412 19.6,54.95
+5v: C4.1 C31.1 L1.P$2 R9.2 VR1.3 X1.9 X1.10 X2.1 X2.2 | length 156.4
  Top Layer w1: L1.P$2 29.725,51.075 34.225,55.575 34.225,58.15 34.15,58.225 34.15,67.925 34.866,68.641 36.649,68.641 37,68.289 C31.1 37,54.375 33.725,51.1 33.725,40.575 33.225,40.075 29.1,40.075 28.075,39.05 R9.2 28.075,36.375 29.075,35.375 31.35,35.375 VR1.3
  Bottom Layer w1: X2.2 X2.1 12.665,95.54 13.675,96.55 13.675,101.225 16.575,104.125 31.775,104.125 40.36,95.54 ; C4.1 34.2,58.225 34.2,65.325 40.36,71.485 40.36,95.54 ; X1.10 X1.9 40.36,95.54
Eth_NRST: IC2.15 U1.23 | length 25.7
  Top Layer w0.2: U1.23 6.575,59.74 6.925,60.09 v1(6.925,60.106) ; IC2.15 18.713,70.313 19.768,70.313 20.006,70.075 20.146,70.075 20.421,69.8 v1(20.475,69.8)
  Bottom Layer w0.2: v1(6.925,60.106) 7.869,60.106 8.825,59.15 14.175,59.15 20.45,65.425 20.45,69.775 v1(20.475,69.8)
GND: C1.2 C2.1 C3.2 C4.2 C5.2 C6.2 C7.2 C8.2 C9.2 C10.2 C11.2 C12.2 C13.2 C14.1 C15.1 C16.1 C17.1 C18.1 C19.1 C20.2 C21.1 C22.2 C23.2 C24.2 C25.2 C26.1 C27.2 C28.2 C29.1 C30.1 C31.2 C32.2 D1.A DD1.3 DD1.5 DD1.6 DG1.2 IC1.4 IC2.25 R1.1 R2.1 R3.1 R4.1 R5.1 R6.1 R7.1 R8.1 R10.2 R20.1 R31.1 R33.2 R34.1 R36.1 R37.1 R38.1 U1.10 U1.20 U1.27 U1.74 U1.99 VD1.K VR1.1 X1.3 X1.4 X1.7 X1.8 X2.3 X2.4 X2.7 X2.8 X3.3 X4.2 X4.4 X5.2 X5.4 XP1.3 XP2.3 XP3.2 | length 1.8
  Top Layer w0.3: C18.1 C19.1
  other v2: 24.9,25.8 19.425,28.275 18,28.8 26.55,32.45 13.525,47.15 9.975,47.425 7.1,49.6 16.725,53.4 10.75,63.825 17.375,70.075 16.2,71.125
I2C_CLK: R11.1 U1.92 X1.5 X2.5 | length 97.5
  Top Layer w0.2: U1.92 19.277,51.803 20.372,51.803 20.838,51.337 21.413,51.337 22.05,50.7 R11.1
  Layer 2 w0.4: X2.5 14.505,104.275 39.445,104.275 X1.5 34.225,91.745 34.225,70.25 23.5,59.525 23.5,53.275 v1(21.488,51.262)
I2C_DATA: R12.1 U1.93 X1.6 X2.6 | length 105.2
  Top Layer w0.2: U1.93 20.506,52.325 20.581,52.4 R12.1
  Layer 3 w0.4: X2.6 8.492,100.802 9.36,100.802 10.568,102.01 11.326,102.01 12,102.684 12,103.442 13.133,104.575 41.685,104.575 41.95,104.31 41.95,102.684 42.624,102.01 44.25,102.01 X1.6 47.425,98.835 47.425,84.164 26.95,63.689 26.95,58 v1(21.35,52.4)
MAC_b0: S1.1 U1.55 | length 39.3
  Top Layer w0.2: S1.1 4.325,5.875 4.325,12.5 7.575,15.75 U1.55
MAC_b1: S1.2 U1.56 | length 38.5
  Top Layer w0.2: S1.2 6.963,5.973 6.963,12.638 8.075,13.75 U1.56
MAC_b2: S1.3 U1.57 | length 38.2
  Top Layer w0.2: S1.3 9.25,5.72 9.25,12.95 8.575,13.625 U1.57
MAC_b3: S1.4 U1.58 | length 39.8
  Top Layer w0.2: U1.58 9.075,20.825 11.1,18.8 12.7,17.2 12.7,6.63 S1.4
MAC_b4: S2.1 U1.59 | length 40.6
  Top Layer w0.2: U1.59 9.575,21.034 15.85,14.759 15.85,5.95 S2.1
MAC_b5: S2.2 U1.60 | length 41.5
  Top Layer w0.2: U1.60 10.075,21.1 12.825,18.35 18.425,12.75 18.425,5.985 S2.2
MAC_b6: S2.3 U1.61 | length 43.6
  Top Layer w0.2: U1.61 10.575,21.166 18.041,13.7 20.15,13.7 20.95,12.9 20.95,5.97 S2.3
MAC_b7: S2.4 U1.62 | length 45.4
  Top Layer w0.2: U1.62 11.075,21.231 17.981,14.325 22,14.325 23.375,12.95 23.375,5.855 S2.4
NetC11_1: C11.1 U1.73 | length 2.6
  Top Layer w0.2: U1.73 16.575,40.3 17,39.875 C11.1
NetC14_2: C14.2 R23.2 U1.6 XP1.2 | length 47.2
  Top Layer w0.2: XP1.2 4.775,29.05 R23.2 ; v1(15.725,55.225) 15.075,55.875 U1.6 15.075,58.585 15.415,58.925 18.75,58.925 19.6,59.775 C14.2
  Layer 2 w0.2: XP1.2 2.675,29 5.6,29 8.225,31.625 8.225,48.975 14.475,55.225 v1(15.725,55.225)
NetC15_2: C15.2 U1.12 X4.3 | length 8.6
  Top Layer w0.2: U1.12 12.075,60.251 13.35,61.526 13.35,61.9 13.567,62.117 14.117,62.117 X4.3 14.267,62.267 14.267,60.542 14.15,60.425 C15.2
NetC17_2: C17.2 U1.13 X4.1 | length 10.3
  Top Layer w0.2: C17.2 10.775,65.25 11.95,65.25 12.05,65.15 X4.1@12.05,64.175 ; U1.13 11.575,59.175 11.125,59.625 11.125,62.95 12.05,63.875 12.05,64.15 X4.1
NetC23_1: C23.1 C24.1 IC2.6 | length 14.3
  Top Layer w0.25: v1(13.55,68.55) 13.636,68.636 13.966,68.636 14.68,69.35 IC2.6
  Top Layer w0.5: C23.1 2.888,69.262 4.812,69.262 C24.1 4.838,69.263 4.838,67.712 v1(4.85,67.7)
  Layer 2 w0.5: v1(4.85,67.7) 5.7,68.55 v1(13.55,68.55)
NetC26_2: C26.2 IC2.4 X5.3 | length 8.9
  Top Layer w0.25: C26.2 7.05,71.075 7.75,71.775 9.8,71.775 11.15,70.425 X5.3 11.375,70.3 13.748,70.3 13.798,70.35 IC2.4
NetC29_2: C29.2 IC2.5 X5.1 | length 8.6
  Top Layer w0.25: C29.2 9.7,66.9 8.95,67.65 X5.1 9.05,68.625 9.95,69.525 13.609,69.525 13.934,69.85 IC2.5
NetC30_2: C30.2 U1.49 | length 6.3
  Top Layer w0.2: C30.2 2.475,43.95 2.85,44.325 U1.49
NetC32_1: C32.1 R14.1 R15.1 R16.1 R17.1 | length 10
  Top Layer w0.25: C32.1 7.075,85.075 7.775,85.775 R17.1 ; R14.1 R17.1 ; R15.1 11.275,84.125 R16.1 R17.1
NetD1_C: D1.C DD1.2 L1.P$1 | length 15.8
  Top Layer w1: L1.P$1 39.725,45.357 41.225,43.857 D1.C 45.35,43.357 DD1.2
NetDD1_4: DD1.4 R9.1 R10.1 | length 17.1
  Top Layer w0.3: R9.1 35.788,37.775 36.588,38.575 R10.1 42.625,38.575 41.95,37.9 DD1.4
NetIC1_1: IC1.1 U1.77 | length 19.6
  Top Layer w0.254: U1.77 21.05,44.325 22.783,42.592 22.783,31.581 20.87,29.668 IC1.1
NetIC1_2: IC1.2 U1.79 | length 21.5
  Top Layer w0.254: U1.79 21.65,45.325 24.037,42.938 24.037,31.565 24.025,31.553 24.025,31.55 22.14,29.665 IC1.2
NetIC1_3: IC1.3 U1.81 | length 23.6
  Top Layer w0.254: U1.81 22.55,46.325 25.373,43.502 25.373,31.309 23.41,29.346 IC1.3
NetIC1_5: IC1.5 U1.80 | length 16.9
  Top Layer w0.25: U1.80 22.075,45.825 24.68,43.22 IC1.5
NetIC1_6: IC1.6 U1.78 | length 15
  Top Layer w0.2: U1.78 21.325,44.825 23.41,42.74 IC1.6
NetIC1_7: IC1.7 U1.82 | length 17.2
  Top Layer w0.2: U1.82 18.1,46.825 17.675,46.4 17.675,43.8 22.14,39.335 IC1.7
NetIC2_2: IC2.2 R38.2 VD6.A | length 30.3
  Top Layer w0.2: R38.2 12.5,92.675 13.925,94.1 v1(13.925,94.125) 13.925,94.26 14.15,94.485 VD6.A ; v1(12.818,71.65) 12.914,71.746 13.408,71.746 13.413,71.75 13.613,71.75 14.013,71.35 IC2.2
  Bottom Layer w0.2: v1(12.818,71.65) 12.85,71.682 12.85,77.125 13.925,78.2 v1(13.925,94.125)
NetIC2_3: IC2.3 R37.2 VD5.A | length 40.8
  Top Layer w0.2: v1(13.468,70.975) 13.568,70.875 14.86,70.875 IC2.3 ; VD5.A 35.85,97.2 v1(35.85,95.35) 35.946,95.254 35.946,94.829 36.675,94.1 R37.2
  Bottom Layer w0.2: v1(13.468,70.975) 13.468,72.868 15.25,74.65 18.425,77.825 18.425,79.775 21.975,83.325 25.45,83.325 35.85,93.725 v1(35.85,95.35)
NetIC2_7: IC2.7 R30.2 | length 22.4
  Top Layer w0.2: v1(14.025,67.45) 14.091,67.45 14.121,67.421 14.451,67.421 15.53,68.5 IC2.7
  Bottom Layer w0.2: R30.2 6.696,55.729 3.55,58.875 3.55,60.675 10.325,67.45 v1(14.025,67.45)
NetIC2_8: IC2.8 R29.2 | length 23.9
  Top Layer w0.2: v1(15.375,66.8) 16.03,67.455 IC2.8
  Bottom Layer w0.2: R29.2 8.45,55.625 6.75,57.325 5.666,57.325 4.1,58.891 4.1,60.5 10.4,66.8 v1(15.375,66.8)
NetIC2_10: IC2.10 R31.2 | length 6.2
  Top Layer w0.25: IC2.10 17.03,66.87 17.375,66.525 19.75,66.525 20.45,67.225 20.55,67.225 20.775,67.45 R31.2
NetIC2_11: IC2.11 R32.2 | length 26.5
  Top Layer w0.2: IC2.11 17.53,67.73 17.825,67.435 v1(17.825,67.3)
  Bottom Layer w0.2: R32.2 10.1,55.65 7.925,57.825 5.731,57.825 4.6,58.956 4.6,60.25 10.375,66.025 16.625,66.025 17.825,67.225 v1(17.825,67.3)
NetIC2_14: IC2.14 R35.2 | length 26.5
  Top Layer w0.25: v1(4.3,66.6) 6.225,64.675 6.225,63.575 5.75,63.1 R35.2 ; IC2.14 18.69,69.835 19.365,69.835 20.35,68.85 v1(21.1,68.85)
  Layer 2 w0.25: v1(4.3,66.6) 11.05,66.6 12.05,65.6 18.725,65.6 21.1,67.975 v1(21.1,68.85)
NetIC2_24: IC2.24 R33.1 | length 6.3
  Top Layer w0.25: R33.1 10.35,74.775 11.6,73.525 14.705,73.525 15.515,72.715 15.515,72.51 IC2.24
NetJ_4: J.4 J.5 R17.2 | length 21.7
  Top Layer w0.25: R17.2 9.55,87.375 17.1,94.925 23.08,94.925 J.5
  Bottom Layer w0.25: J.5 24.38,92.355 J.4
NetJ_7: J.7 J.8 R16.2 | length 13.9
  Top Layer w0.2: R16.2 11.375,87.375 15.085,91.085 J.8 21.84,92.355 J.7
NetR1_2: R1.2 S1.8 | length 2.3
  Bottom Layer w0.25: R1.2 2.425,10.325 3.115,11.015 S1.8
NetR2_2: R2.2 S1.7 | length 2.2
  Bottom Layer w0.25: R2.2 5.225,10.325 5.655,10.755 S1.7
NetR3_2: R3.2 S1.6 | length 2.1
  Bottom Layer w0.25: R3.2 8.085,10.435 8.085,12.175 S1.6
NetR4_2: R4.2 S1.5 | length 2
  Bottom Layer w0.25: S1.5 10.755,12.265 10.755,10.345 R4.2
NetR5_2: R5.2 S2.8 | length 2
  Bottom Layer w0.25: S2.8 14.582,12.267 14.582,10.343 R5.2
NetR6_2: R6.2 S2.7 | length 2.1
  Bottom Layer w0.25: S2.7 17.252,12.137 17.252,10.45 17.377,10.325 R6.2
NetR7_2: R7.2 S2.6 | length 2.2
  Bottom Layer w0.25: S2.6 19.645,10.83 20.15,10.325 R7.2
NetR8_2: R8.2 S2.5 | length 2.3
  Bottom Layer w0.25: S2.5 22.185,11.09 22.95,10.325 R8.2
NetR13_1: R13.1 X1.1 X1.2 X2.9 X2.10 | length 59.9
  Top Layer w1: X2.10 X2.9 X1.1 X1.2 47.139,105.7 47.875,104.964 47.875,92.975 45.875,90.975 R13.1
NetR14_2: R14.2 T1.10 | length 18.7
  Top Layer w0.25: R14.2 9.45,81.257 9.582,81.125 14.575,81.125 18,84.55 21.925,84.55 22.75,85.375 T1.10
NetR15_2: R15.2 T1.15 | length 9
  Top Layer w0.25: R15.2 14.2,82.5 16.4,84.7 T1.15
NetR19_1: R19.1 VD1.A | length 3
  Top Layer w0.5: VD1.A 39.35,95.83 39.425,95.755 39.425,95.625 39.525,95.525 R19.1
NetR20_2: R20.2 U1.94 | length 4.1
  Top Layer w0.2: U1.94 20.418,52.825 21.968,54.375 R20.2
NetR21_1: R21.1 U1.7 | length 51.7
  Top Layer w0.2: U1.7 14.575,53.885 15.05,53.41 v1(15.05,51.65) ; R21.1 v1(28.85,13.6)
  Layer 2 w0.2: v1(15.05,51.65) 15.05,50.45 22.875,42.625 22.875,30.3 28.85,24.325 v1(28.85,13.6)
NetR21_2: R21.2 VD2.K | length 2.4
  Top Layer w0.25: VD2.K 28.85,7.825 R21.2
NetR22_1: R22.1 U1.8 | length 54
  Top Layer w0.25: v1(13.675,53.275) 13.675,54.772 14.075,55.172 U1.8 ; v1(31.925,13.575) 31.925,11.825 R22.1
  Layer 2 w0.25: v1(13.675,53.275) 14.38,53.275 23.675,43.98 23.675,30.775 31.925,22.525 v1(31.925,13.575)
NetR22_2: R22.2 VD3.K | length 2.4
  Top Layer w0.25: R22.2 32.025,7.825 VD3.K
NetR24_1: R24.1 U1.9 | length 53.4
  Top Layer w0.2: v1(12.95,51.6) 12.95,55.3 13.575,55.925 13.575,56.825 U1.9 ; v1(25.475,13.5) 25.475,11.775 R24.1
  Layer 2 w0.2: v1(12.95,51.6) 22.15,42.4 22.15,30.125 28.1,24.175 28.1,16.125 v1(25.475,13.5)
NetR24_2: R24.2 VD4.K | length 2.4
  Top Layer w0.25: VD4.K 25.525,7.825 R24.2
NetR34_2: R34.2 VD5.K | length 2
  Top Layer w0.25: VD5.K 35.975,99.625 R34.2
NetR36_2: R36.2 VD6.K | length 2
  Top Layer w0.25: R36.2 14.125,99.325 VD6.K
NetR39_1: R39.1 XP2.2 | length 40.5
  Top Layer w0.2: R39.1 22.125,59.625 22.979,60.479 22.979,60.679 v1(23.075,60.775)
  Bottom Layer w0.2: v1(23.075,60.775) 23.075,23.207 23.79,22.492 XP2.2
NetR39_2: R39.2 U1.1 | length 4.2
  Top Layer w0.2: U1.1 17.575,58.11 17.615,58.15 19.25,58.15 20.525,59.425 R39.2
NetU1_72: U1.72 X3.2 | length 8.2
  Top Layer w0.2: X3.2 16.075,36.89 U1.72
NetU1_76: U1.76 X3.4 | length 19.1
  Top Layer w0.2: U1.76 19.895,43.825 21.204,42.516 21.204,42.271 v1(21.3,42.175)
  Layer 2 w0.2: X3.4 14.01,29.725 15.275,29.725 21.3,35.75 v1(21.3,42.175)
P1_RX_N: IC2.22 R25.1 T1.8 | length 20.5
  Top Layer w0.25: v1(15.287,76.8) 15.287,76.678 15.089,76.48 15.089,75.982 15.221,75.85 15.225,75.85 15.45,75.625 R25.1 15.45,75.425 15.225,75.2 15.221,75.2 15.089,75.068 15.089,74.882 16.53,73.441 IC2.22 ; v1(23.25,81.475) 23.25,81.353 23.052,81.155 23.052,80.563 23.002,80.513 23.002,80.326 23.134,80.195 23.375,80.195 24.02,79.549 T1.8
  Layer 2 w0.25: v1(15.287,76.8) 15.287,76.922 15.089,77.12 15.089,77.343 15.771,78.025 22.334,78.025 23.052,78.743 23.052,81.155 23.25,81.353 v1(23.25,81.475)
P1_RX_P: IC2.23 R26.1 T1.6 | length 20.5
  Top Layer w0.25: v1(14.387,76.8) 14.387,76.678 14.585,76.48 14.585,75.982 14.454,75.85 14.45,75.85 14.225,75.625 R26.1 14.225,75.425 14.45,75.2 14.454,75.2 14.585,75.068 14.585,74.673 16.03,73.229 IC2.23 ; T1.6 21.48,79.549 22.125,80.195 22.366,80.195 22.498,80.326 22.498,80.721 22.548,80.771 22.548,81.155 22.35,81.353 v1(22.35,81.475)
  Layer 2 w0.25: v1(14.387,76.8) 14.387,76.922 14.585,77.12 14.585,77.552 15.563,78.529 22.125,78.529 22.548,78.952 22.548,81.155 22.35,81.353 v1(22.35,81.475)
P1_TX_N: IC2.20 R27.1 T1.3 | length 13.9
  Top Layer w0.25: IC2.20 17.53,73.318 18.12,73.908 20.25,73.908 20.989,74.648 20.989,75.043 21.121,75.175 21.125,75.175 21.35,75.4 R27.1 21.35,75.6 21.125,75.825 21.121,75.825 20.989,75.957 20.989,76.352 19.962,77.379 17.4,77.379 17.211,77.19 16.784,77.19 16.652,77.322 16.652,77.508 16.784,77.64 17.025,77.64 17.67,78.285 T1.3
P1_TX_P: IC2.21 R28.1 T1.1 | length 13.9
  Top Layer w0.25: T1.1 15.13,78.285 15.775,77.64 16.016,77.64 16.148,77.508 16.148,77.113 16.575,76.686 17.42,76.686 17.609,76.875 19.754,76.875 20.485,76.143 20.485,75.957 20.354,75.825 20.35,75.825 20.125,75.6 R28.1 20.125,75.4 20.35,75.175 20.354,75.175 20.485,75.043 20.485,74.857 20.041,74.412 17.917,74.412 17.03,73.525 IC2.21
RESET: U1.14 X3.1 | length 21.4
  Top Layer w0.254: U1.14 11.088,57.492 11.088,55.362 11.45,55 v1(11.45,48.175)
  Layer 2 w0.254: v1(11.45,48.175) 11.45,39.905 13.377,37.978 X3.1
RMII_CRS_DV: R32.1 U1.32 | length 8.3
  Top Layer w0.2: U1.32 8.85,52.825 v1(9.975,51.7)
  Bottom Layer w0.2: v1(9.975,51.7) 9.975,53.325 R32.1
RMII_MDC: IC2.13 U1.16 | length 18.1
  Top Layer w0.2: U1.16 10.075,59.706 10.1,59.731 v1(10.1,59.925) ; IC2.13 18.675,69.025 v1(19.55,68.15)
  Bottom Layer w0.2: v1(10.1,59.925) 13.525,59.925 16.825,63.225 19.55,65.95 v1(19.55,68.15)
RMII_MDIO: IC2.12 U1.25 | length 21.3
  Top Layer w0.2: v1(5.35,59.825) 5.35,59.09 5.575,58.865 U1.25 ; IC2.12 18.03,68.5 18.779,67.751 18.779,67.496 v1(18.875,67.4)
  Bottom Layer w0.2: v1(5.35,59.825) 10.875,65.35 17.75,65.35 18.875,66.475 v1(18.875,67.4)
RMII_REF_CLK: R35.1 U1.24 | length 4.2
  Top Layer w0.2: R35.1 5.75,61.5 6.075,61.175 U1.24
RMII_RXD0: R29.1 U1.33 | length 6.8
  Top Layer w0.2: U1.33 7.675,52.325 v1(8.475,51.525)
  Bottom Layer w0.2: R29.1 8.475,53.425 v1(8.475,51.525)
RMII_RXD1: R30.1 U1.34 | length 5
  Top Layer w0.2: U1.34 6.181,51.825 6.581,51.425 v1(6.7,51.425)
  Bottom Layer w0.2: R30.1 6.7,53.421 v1(6.7,51.425)
RMII_TX_EN: IC2.16 U1.48 | length 40.6
  Top Layer w0.2: U1.48 5.275,44.825 v1(6.225,45.775) ; IC2.16 18.715,70.81 20.19,70.81 v1(20.275,70.725)
  Layer 2 w0.2: v1(6.225,45.775) 4.675,47.325 4.675,53.55 5.65,54.525 8.625,54.525 22.25,68.15 22.25,70.15 21.675,70.725 v1(20.275,70.725)
RMII_TXD0: IC2.17 U1.51 | length 43.5
  Top Layer w0.2: U1.51 5.575,44.075 v1(6.225,44.725) ; IC2.17 19.49,71.35 19.765,71.625 v1(19.9,71.625)
  Layer 2 w0.2: v1(6.225,44.725) 6.975,45.475 6.975,46.175 5.225,47.925 5.225,53.35 5.875,54 9.2,54 22.725,67.525 22.725,70.575 21.675,71.625 v1(19.9,71.625)
RMII_TXD1: IC2.18 U1.52 | length 44.5
  Top Layer w0.2: U1.52 6.075,43.65 v1(7.275,44.85) ; IC2.18 18.88,71.85 19.534,72.504 19.679,72.504 v1(19.775,72.6)
  Layer 2 w0.2: v1(7.275,44.85) 7.371,44.946 7.371,45.305 7.375,45.309 7.375,46.95 5.825,48.5 5.825,52.775 6.525,53.475 9.425,53.475 23.325,67.375 23.325,70.875 21.6,72.6 v1(19.775,72.6)
RX: U1.69 XP3.1 | length 22.7
  Top Layer w0.2: U1.69 14.575,40.9 12.6,38.925 12.6,26.847 XP3.1
TR_RX_N: J.6 T1.9 | length 5.2
  Top Layer w0.25: J.6 22.992,90.967 22.23,90.967 22.098,90.835 22.098,90.649 23.002,89.745 23.002,89.092 23.134,88.96 23.375,88.96 24.02,88.315 T1.9
TR_RX_P: J.3 T1.11 | length 10.7
  Top Layer w0.25: T1.11 21.48,88.315 22.125,88.96 22.366,88.96 22.498,89.092 22.498,89.536 21.594,90.44 21.594,91.044 22.742,92.192 25.487,92.192 J.3
TR_TX_N: J.2 T1.14 | length 17.3
  Top Layer w0.25: v1(16.85,90.225) 16.85,90.103 16.652,89.905 16.652,89.092 16.784,88.96 17.025,88.96 17.67,88.315 T1.14
  Layer 2 w0.25: v1(16.85,90.225) 16.85,90.347 16.652,90.545 16.652,90.768 17.993,92.109 20.994,92.109 21.006,92.097 22.588,92.097 22.6,92.109 23.563,92.109 23.575,92.097 25.07,92.097 25.082,92.109 26.074,92.109 26.086,92.097 27.553,92.097 27.872,92.416 28.058,92.416 28.19,92.284 J.2
TR_TX_P: J.1 T1.16 | length 18.5
  Top Layer w0.25: T1.16 15.13,88.315 15.775,88.96 16.016,88.96 16.148,89.092 16.148,89.905 15.95,90.103 v1(15.95,90.225)
  Layer 2 w0.25: v1(15.95,90.225) 15.95,90.347 16.148,90.545 16.148,90.977 17.784,92.613 21.203,92.613 21.215,92.601 22.379,92.601 22.391,92.613 23.772,92.613 23.784,92.601 24.862,92.601 24.874,92.613 26.283,92.613 26.295,92.601 27.344,92.601 27.663,92.92 28.267,92.92 28.374,92.812 28.647,92.812 J.1
TX: U1.68 XP3.3 | length 20.9
  Top Layer w0.2: XP3.3 12,22.367 12,38.925 14.075,41 U1.68
V_24pwr: C1.1 C3.1 DD1.1 DG1.1 R13.2 R19.2 | length 152.4
  Top Layer w0.5: R19.2 39.625,87.55 41.425,85.75 R13.2
  Top Layer w1: R13.2 42.8,85.625 42.8,84.336 43.386,83.75 45.625,83.75 47.425,81.95 47.425,81.175 ; C3.1 46.739,77.939 47.425,78.625 47.425,81.175 ; DD1.1 47.05,36.35 49.15,38.45 49.15,53.9 48.2,54.85 44.875,54.85 43.875,55.85 43.875,67.7 42.575,69 42.575,80.824 42.926,81.175 47.425,81.175
  Top Layer w2: C1.1 48.45,60.7 48.45,76.228 47.278,77.4 C3.1
  Bottom Layer w2: DG1.1 44.1,12.575 47.875,16.35 47.875,56.225 C1.1
pads on no net: J. T1.4 T1.5 T1.12 T1.13 U1.2 U1.3 U1.4 U1.5 U1.15 U1.17 U1.18 U1.26 U1.29 U1.30 U1.31 U1.35 U1.36 U1.37 U1.38 U1.39 U1.40 U1.41 U1.42 U1.43 U1.44 U1.45 U1.46 U1.47 U1.53 U1.54 U1.63 U1.64 U1.65 U1.66 U1.67 U1.70 U1.71 U1.83 U1.84 U1.85 U1.86 U1.87 U1.88 U1.89 U1.90 U1.91 U1.95 U1.96 U1.97 U1.98

## Polygon pours and split planes (outlines as drawn)
GND on Bottom Layer "GND" (solid, remove dead copper, pour order 0): 0,0 0,108 50,108 50,0
GND on Layer 3 "GND" (solid, remove dead copper, pour order 1): 0,0 0,108 50,108 50,0
GND on Layer 2 "GND" (solid, remove dead copper, pour order 2): 0,0 0,108 50,108 50,0
GND on Top Layer "GND" (solid, remove dead copper, pour order 3): 0,0 0,108 50,108 50,0

## Keep-outs
Keep-Out Layer:
  the board outline again, w0.3

## Silkscreen, mask and mechanical layers (free items; w line width, h text height)
Top Overlay:
  circle w0.254: c14.25,72.75 r0.106
  lines w0.3: 0,17.5 50,17.5 ; 0,90.5 15.275,90.5 ; 34.15,90.5 50,90.5
  text "B0" at 2.15,14.1 h0.8
  text "B1" at 4.979,14.1 h0.8
  text "B2" at 7.807,14.1 h0.8
  text "B3" at 10.636,14.1 h0.8
  text "B4" at 13.464,14.1 h0.8
  text "B5" at 16.293,14.1 h0.8
  text "B6" at 19.121,14.1 h0.8
  text "B7" at 21.95,14.1 h0.8
  text "24" at 41.625,13.9 h0.8
  text "+" at 44.625,13.767 h0.8
  text "-" at 39.375,13.5 h0.8